# EAGLE board tiny_base3 (EAGLE 9.6.2)
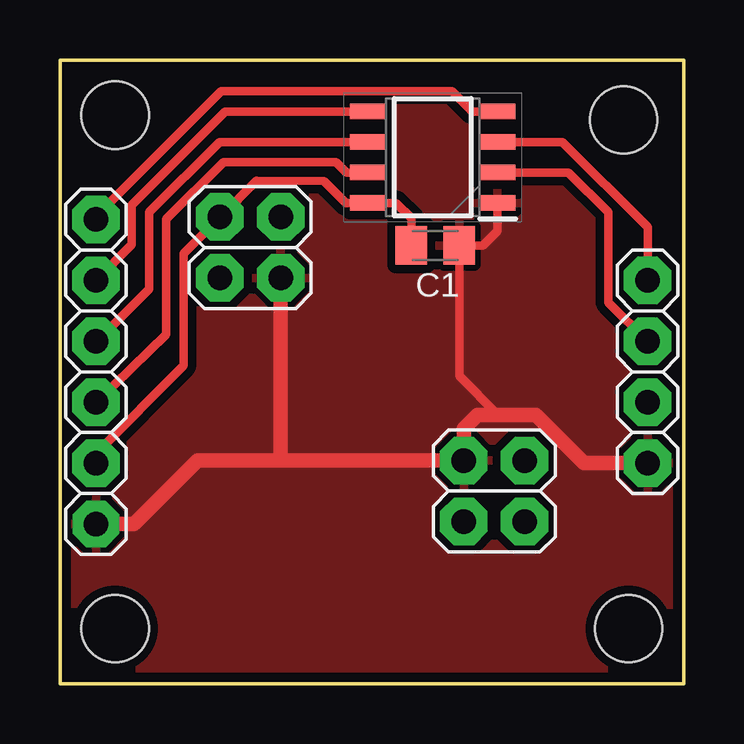
[diagram p0: board, top side]
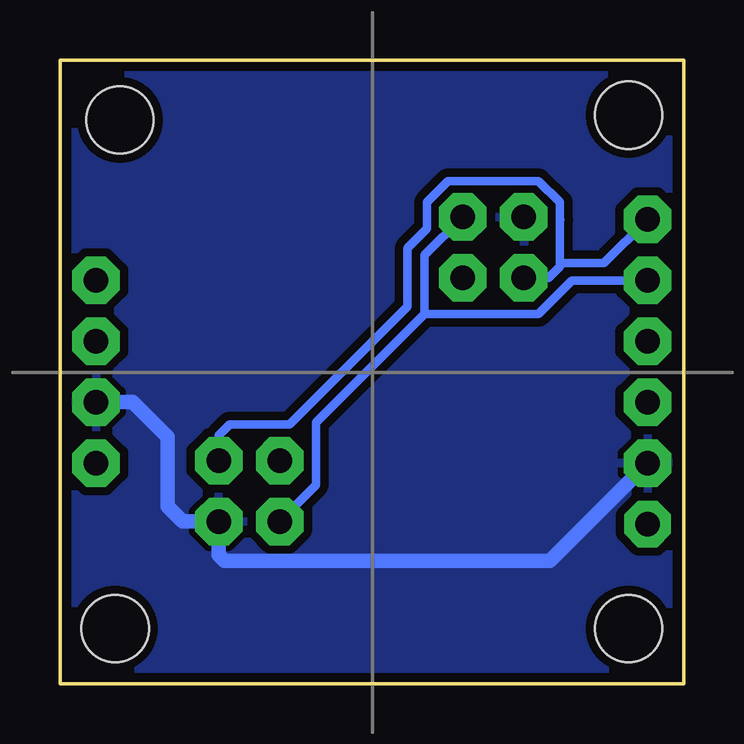
[diagram p1: board, bottom side, seen from below]

Size 26 x 26 mm. Coordinates in mm from the lower left corner, seen from the top.
Outline: 0,0 0,26 26,26 26,0 0,0
Copper layers (1*16): Top 0.035mm / dielectric 1.5mm / Bottom 0.035mm
Design rules "default *": minimum track width 14mil, minimum drill 0.35mm, track to track 14mil, track to pad 13mil, pad to pad 14mil, via to via 14mil, smd to smd 14mil, copper to edge 15mil, drill to drill 15mil, minimum pad ring 10mil, minimum via ring 8mil, stop-mask expansion 4mil, vias tented up to drill 0mil, thermal gap 10mil
Holes 2.8 mm at 2.3,2.3 23.5,23.5 23.7,2.3 2.3,23.7

## Footprints (pad centres in the part's own frame; a part is rotated, then mirrored left to right if it is on the bottom)
C0805K = smd 1.3 x 1.6: 1 -1,0; 2 1,0
SOIC127P600X175-8N = smd 1.5 x 0.65: 1 -2.7,1.905; 2 -2.7,0.635; 3 -2.7,-0.635; 4 -2.7,-1.905; 5 2.7,-1.905; 6 2.7,-0.635; 7 2.7,0.635; 8 2.7,1.905
1X04 = drill 1.016 pad 1.981 octagon: 1 -3.81,0; 2 -1.27,0; 3 1.27,0; 4 3.81,0
1X06 = drill 1.016 pad 1.93 octagon: 1 -6.35,0 | drill 1.016 pad 1.981 octagon: 2 -3.81,0; 3 -1.27,0; 4 1.27,0; 5 3.81,0; 6 6.35,0
2X02 = drill 1.016 pad 1.981 octagon: 1 -1.27,-1.27; 2 -1.27,1.27; 3 1.27,-1.27; 4 1.27,1.27

## Placement (x,y rotation side)
C1  [C0805K]  15.65,18.26 180 top
IC1  ATTINY412-SSN  [SOIC127P600X175-8N]  15.54,21.95 180 top
JP1  [1X04]  24.5,13 270 top
JP2  [1X06]  1.5,13 90 top
JP3  [2X02]  18.11,8.03 270 top
JP4  [2X02]  7.93,18.18 270 top

## Library data of the parts
C1 = rcl; SPICEPREFIX: C
IC1 = ATTINY412-SSN; DESCRIPTION: 8-bit Microcontrollers - MCU 20MHz, 4KB, SOIC8, Ind 105C, Green, Tube; HEIGHT: 1.75mm; MANUFACTURER_NAME: Microchip; MANUFACTURER_PART_NUMBER: ATTINY412-SSN; MOUSER_PART_NUMBER: 579-ATTINY412-SSN; MOUSER_PRICE-STOCK: https://www.mouser.co.uk/ProductDetail/Microchip-Technology/ATTINY412-SSN?qs=3HJ2avRr9PItQG9ZsCamPQ%3D%3D
JP1-JP4 = pinhead2

## Nets
GND: C1.2 IC1.8 JP1.3 JP2.2 JP3.4 JP4.1
P0: IC1.2 JP1.2
P1: IC1.3 JP1.1
P4: IC1.7 JP2.3
SCL: IC1.5 JP2.5 JP3.3 JP4.2
SDA: IC1.4 JP2.6 JP3.2 JP4.3
UPDI: IC1.6 JP2.4
VDD: C1.1 IC1.1 JP1.4 JP2.1 JP3.1 JP4.4

## Tracks (layer width: path | path; a pad name or v marks a point on that pad's centre or on a via)
GND
  Top 0.356: JP2.2 1.5,9.6 5.16,13.25 5.16,17.92 6.67,19.43 JP4.1 6.69,19.45 8.21,20.97 11.02,20.95 11.93,20.04 IC1.8 14.01,20.04 14.65,19.41 C1.2
  Bottom 0.61: JP1.3 22.96,11.73 21.51,10.29 21.51,7.39 20.88,6.76 JP3.4 19.38,5.36 19.14,5.12 5.57,5.12 JP2.2
  pour Bottom: 0,26 0,0 26,0 26,26
P0
  Top 0.356: JP1.2 22.87,15.9 22.87,19.65 21.2,21.31 IC1.2
P1
  Top 0.356: IC1.3 20.95,22.58 24.5,19.03 JP1.1
P4
  Top 0.356: JP2.3 1.52,11.73 4.43,14.55 4.43,19.36 6.82,21.74 11.52,21.74 11.95,21.31 IC1.7
SCL
  Top 0.356: 12.8,23.8 IC1.5 6.89,23.85 3,19.95 3,18.31 JP2.5
  Bottom 0.356: JP3.3 15.32,8.28 15.32,10.89 10.79,15.41 | JP4.2 10.79,17.86 10.79,15.41 | 10.79,15.41 6.04,15.41 4.65,16.81 JP2.5
SDA
  Top 0.356: JP2.6 1.5,19.48 6.71,24.7 16.35,24.7 17.2,23.85 IC1.4
  Bottom 0.356: 5.17,19.33 5.17,20.07 6.04,20.95 9.83,20.95 10.7,20.07 10.7,18.96 11.51,18.16 11.51,15.72 16.43,10.79 18.93,10.79 19.38,10.35 JP3.2 | 5.17,19.33 5.17,17.59 | 5.17,17.59 5.17,17.38 5.64,16.91 JP4.3 | 5.15,19.35 5.17,19.33 | JP2.6 3.32,17.53 5.11,17.53 5.17,17.59
UPDI
  Top 0.356: JP2.4 1.52,14.27 3.71,16.45 3.71,19.66 6.65,22.58 IC1.6
VDD
  Top 0.356: C1.1 17.63,18.26 18.24,18.88 IC1.1 | C1.1 16.66,18.25 | C1.1 16.65,12.82 18.26,11.2
  Top 0.61: 9.21,16.96 JP4.4 9.21,9.31 9.2,9.3 | JP1.4 21.85,9.19 19.84,11.2 18.26,11.2 17.4,11.2 16.84,10.64 JP3.1 9.2,9.3 | 9.2,9.3 5.75,9.3 3.1,6.65 JP2.1
  pour Top: 0,26 0,0 26,0 26,26

## Text on the board
bDocu: SDA | SCL | P1 | UPDI | P0 | P4 | GND | GND | VCC | VCC